# Allegro board WAITINGPATIENTSIGN.brd
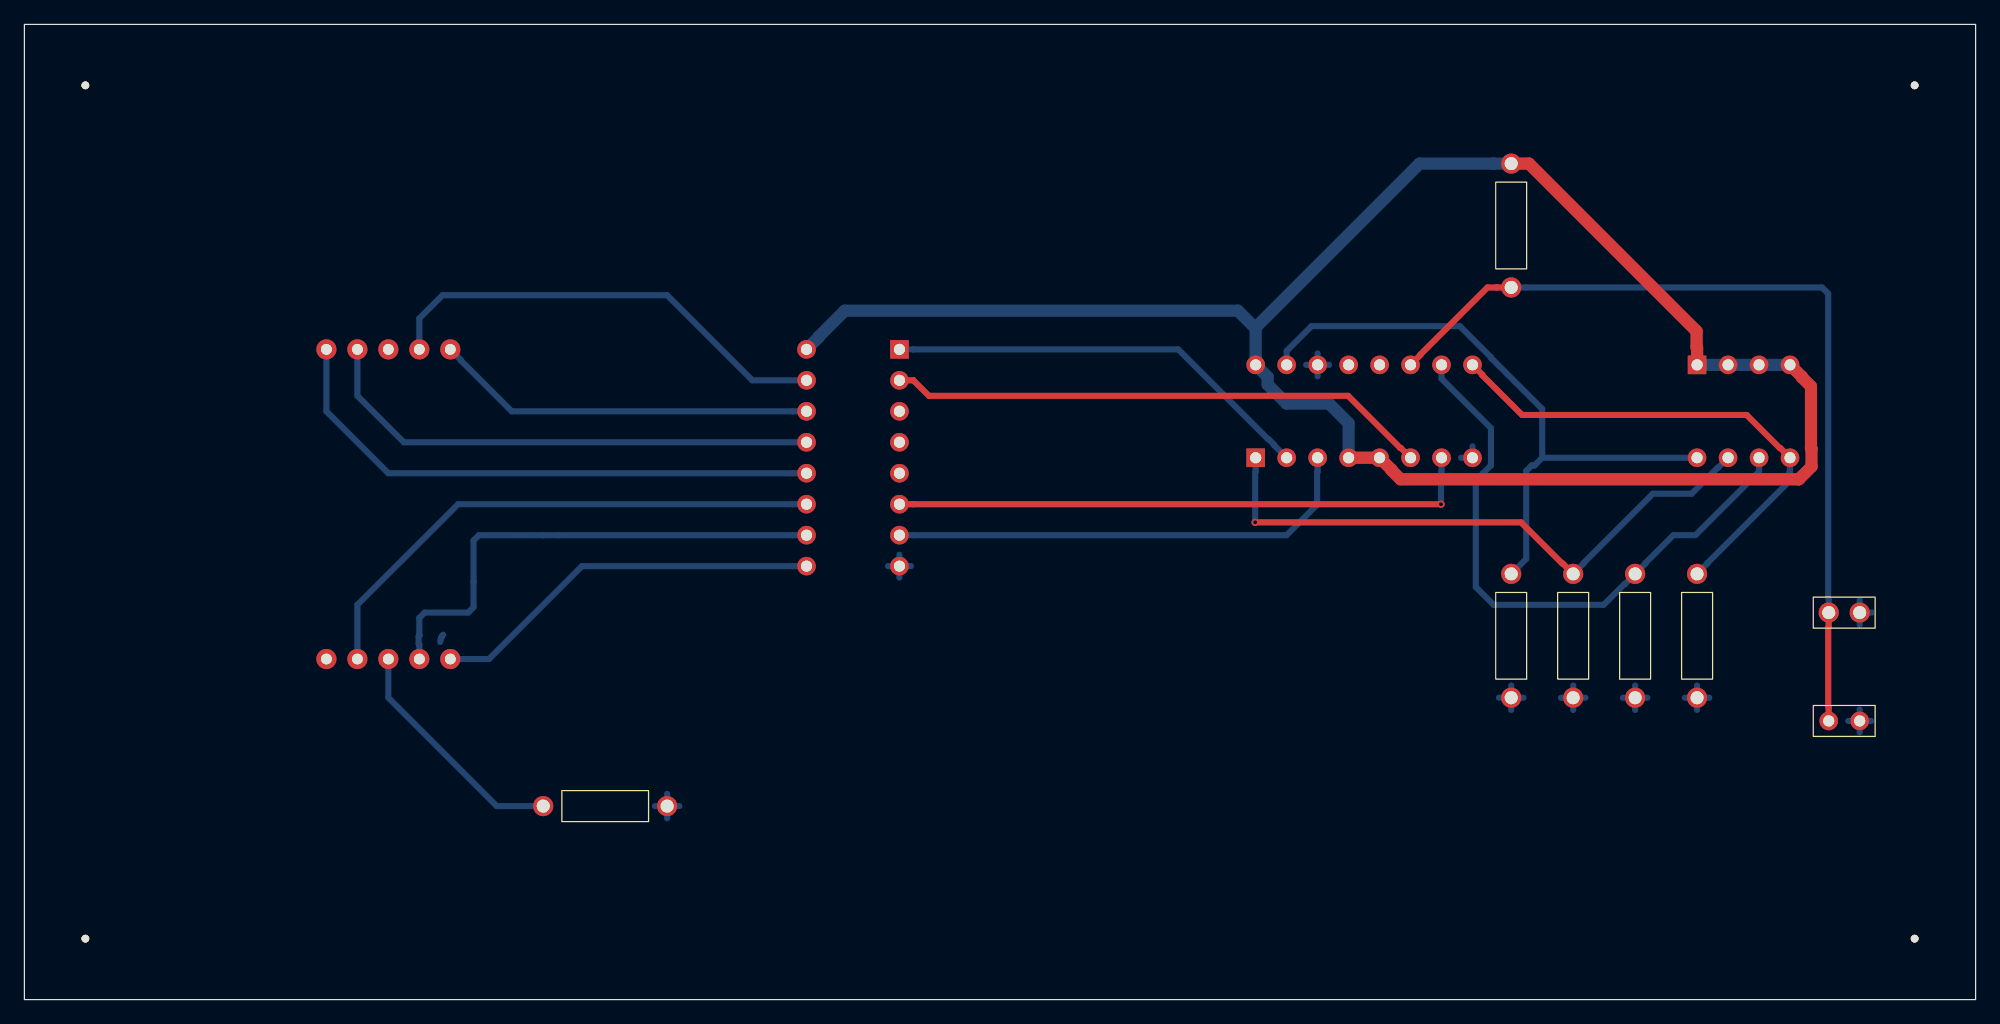
[diagram p0: board, top side]
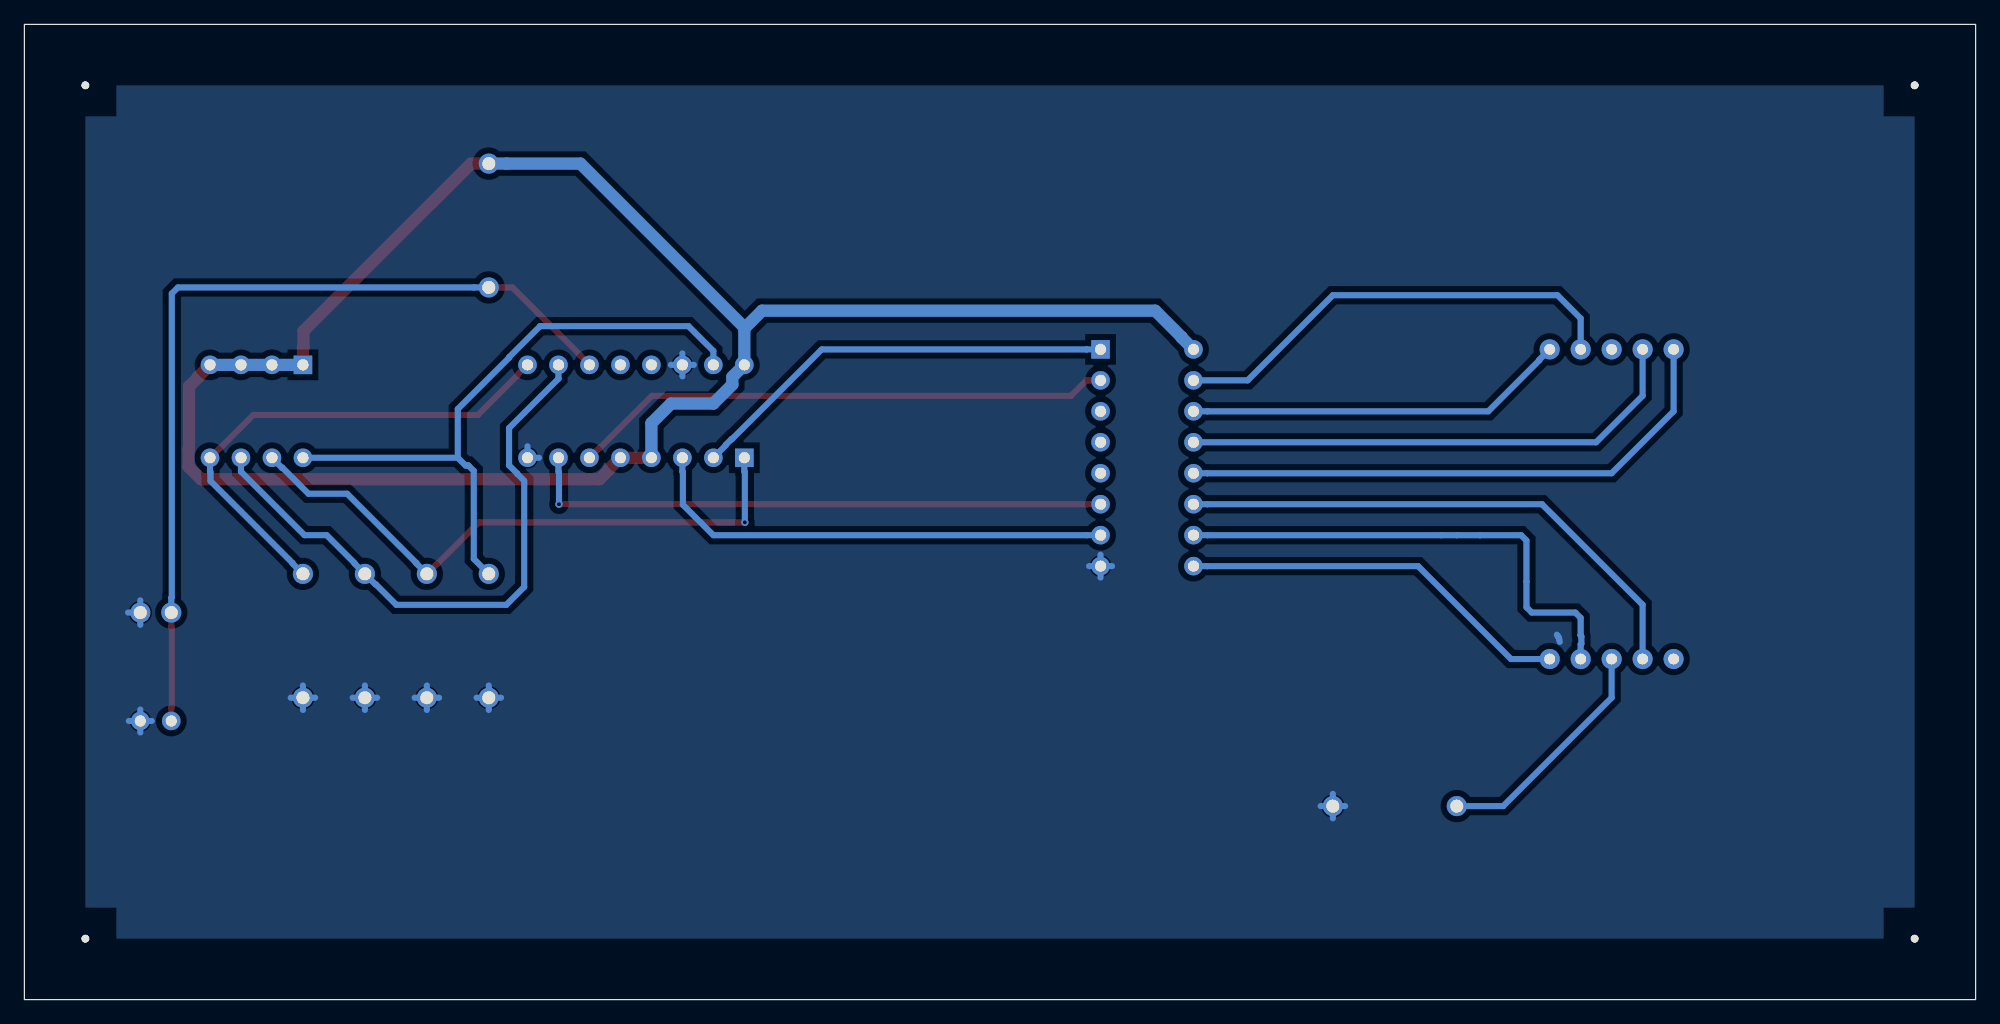
[diagram p1: board, bottom side, seen from below]

Outline 160 x 80 mm; copper layers: TOP, BOTTOM. Coordinates in mm from the lower left corner of the outline.
Outline path: rectangle 0,0 160,80

## Design rules (mm)
nets with their own width: min track width 1; nets GND VCC

## Placement (name value [footprint] x y rotation side)
C1  0.047u  [CAPCK05]  147.96 31.75 270 top
DS1  -  [FND_K]  17.14 35.56 180 bottom
NOREF  -  [unnamed]  5 75 0 top
NOREF#2  -  [unnamed]  155 5 0 top
NOREF#3  -  [unnamed]  155 75 0 top
NOREF#4  -  [unnamed]  5 5 0 top
R1  1k  [RES400]  121.92 68.58 180 top
R2  1k  [RES400]  137.16 34.92 180 top
R3  1k  [RES400]  132.08 34.92 180 top
R4  1k  [RES400]  127 34.92 180 top
R5  1k  [RES400]  121.92 34.92 180 top
R6  300  [RES400]  42.55 15.88 270 top
SW1  SW DIP-4/SM  [DIP8_3]  137.16 52.07 270 bottom
SW2  SW PUSHBUTTON  [JUMPER2]  150.5 22.86 180 top
U1  74LS192  [DIP16_3]  100.97 44.45 90 top
U2  7448  [DIP16_3]  71.75 53.34 180 bottom

## Library data of the parts
C1 = CAP NP: Tolerance: ***; User Part Number: ***
DS1 = FND_K_5
R1-R6 = R: Tolerance: ***; User Part Number: ***
SW1 = SW DIP-4/SM: Tolerance: ***; User Part Number: ***
SW2 = SW PUSHBUTTON: User Part Number: ***
U1 = 74LS192_0: Tolerance: ***; User Part Number: ***
U2 = 7448_0: Tolerance: ***; User Part Number: ***

## Footprints (pads in the part's own frame, mm; a bottom-side part is the same pattern mirrored in y, then rotated)
CAPCK05
  round 1.651 hole 1.067: 1(0,0) 2(0,2.54)
DIP8_3
  rect 1.524x1.524 hole 0.914: 1(0,0)
  round 1.524 hole 0.914: 2(0,-2.54) 3(0,-5.08) 4(0,-7.62) 5(7.62,-7.62) 6(7.62,-5.08) 7(7.62,-2.54) 8(7.62,0)
DIP16_3
  rect 1.524x1.524 hole 0.914: 1(0,0)
  round 1.524 hole 0.914: 2(0,-2.54) 3(0,-5.08) 4(0,-7.62) 5(0,-10.16) 6(0,-12.7) 7(0,-15.24) 8(0,-17.78) 9(7.62,-17.78) 10(7.62,-15.24) 11(7.62,-12.7) 12(7.62,-10.16) 13(7.62,-7.62) 14(7.62,-5.08) 15(7.62,-2.54) 16(7.62,0)
FND_K
  round 1.651 hole 0.889: 1(-17.78,-7.62) 2(-15.24,-7.62) 3(-12.7,-7.62) 4(-10.16,-7.62) 5(-7.62,-7.62) 6(-7.62,17.78) 7(-10.16,17.78) 8(-12.7,17.78) 9(-15.24,17.78) 10(-17.78,17.78)
JUMPER2
  round 1.524 hole 0.914: 1(0,0) 2(2.54,0)
RES400
  round 1.651 hole 1.067: 1(0,0) 2(0,10.16)
unnamed
  round 0.635 hole 3.175 unplated: (0,0)

## Nets
GND: C1.2 R2.2 R3.2 R4.2 R5.2 R6.2 SW2.1 U1.8(GND) U1.14(CLR) U2.8(GND)
VCC: R1.1 SW1.1(A1) SW1.2(A2) SW1.3(A3) SW1.4(A4) U1.4(CLKD) U1.5(CLKU) U1.16(VCC) U2.16(VCC)
N00502: R5.1 SW1.8(B1) U1.15(P0)
N00506: R4.1 SW1.7(B2) U1.1(P1)
N00510: R3.1 SW1.6(B3) U1.10(P2)
N00514: R2.1 SW1.5(B4) U1.9(P3)
N00708: C1.1 R1.2 SW2.2 U1.11(L\O\A\D\)
N00725: U1.3(Q0) U2.7(D0)
N00729: U1.2(Q1) U2.1(D1)
N00733: U1.6(Q2) U2.2(D2)
N00737: U1.7(Q3) U2.6(D3)
N02113: DS1.7(A) U2.13(A)
N02117: DS1.6(B) U2.12(B)
N02121: DS1.4(C) U2.11(C)
N02125: DS1.2(D) U2.10(D)
N02129: DS1.1(E) U2.9(E)
N02133: DS1.9(F) U2.15(F)
N02137: DS1.10(G) U2.14(G)
N04357: DS1.3(COM) R6.1

Pads without a net: DS1 5 8; U1 12 13; U2 3 4 5

## Via types
v1: diameter 0.61, hole 0.33, TOP to BOTTOM, 2 vias

## Routing (per net, layer and track width the routed paths; a pad name or vN(x,y) marks a point on that pad's centre or on a via; arc(x,y) is an arc through that point)
GND: length 36.8
  BOTTOM w0.5: 51.7,15.88 R6.2 ; R6.2 53.71,15.88 ; R6.2 52.7,14.87 ; R6.2 52.7,16.88 ; 34.18,29.66 34.2,29.73 34.21,29.75 34.23,29.79 34.24,29.8 34.29,29.88 34.34,29.93 ; R3.2 133.08,24.77 ; R3.2 132.08,25.77 ; R3.2 131.08,24.77 ; R3.2 132.08,23.76 ; 34.16,29.63 34.15,29.58 34.15,29.57 34.1,29.34 ; 127,23.76 R4.2 ; R4.2 127,25.77 ; R4.2 128,24.77 ; R4.2 126,24.77 ; 70.81,35.56 U2.8 ; U2.8 71.75,34.62 ; U2.8 72.69,35.56 ; U2.8 71.75,36.5 ; 136.16,24.77 R2.2 ; R2.2 137.16,23.76 ; R2.2 138.16,24.77 ; R2.2 137.16,25.77 ; 105.11,52.07 U1.14 ; U1.14 106.05,51.13 ; U1.14 106.98,52.07 ; U1.14 106.05,53.01 ; 121.92,23.76 R5.2 ; R5.2 120.92,24.77 ; R5.2 122.92,24.77 ; R5.2 121.92,25.77 ; 149.56,22.86 SW2.1 ; SW2.1 150.5,23.8 ; SW2.1 151.44,22.86 ; SW2.1 150.5,21.92 ; 117.81,44.45 U1.8 118.75,45.39 ; C1.2 150.5,32.75 ; C1.2 151.5,31.75 ; C1.2 150.5,30.75
VCC: length 160.7
  TOP w1: R1.1 123.37,68.58 137.12,54.84 137.12,53.5 137.16,53.46 SW1.1 ; SW1.4 145.76,51.09 145.76,51.04 146.5,50.31 146.5,45.22 146.54,45.18 146.54,43.72 145.51,42.69 145.47,42.69 145.47,42.69 112.84,42.69 112.11,43.42 112.11,43.47 U1.5 111.12,44.45 108.59,44.45 108.58,44.45
  BOTTOM w1: 100.92,55.1 99.51,56.52 67.27,56.52 65.12,54.36 65.12,54.32 64.14,53.34 ; 100.92,55.1 100.97,55.06 U1.16 101.95,51.09 101.95,50.45 103.5,48.9 106.97,48.9 108.58,47.28 108.58,44.45 ; 100.92,55.1 114.4,68.58 120.47,68.58 120.47,68.58 R1.1 ; SW1.4 144.78,52.07 142.24,52.07 SW1.3 142.24,52.07 139.7,52.07 SW1.2 139.7,52.07 137.16,52.07 SW1.1
N00502: length 53.2
  BOTTOM w0.5: SW1.8 124.46,44.45 ; 124.46,44.45 123.83,43.81 123.63,43.81 123.63,43.81 123.59,43.81 123.15,43.37 123.15,36.15 R5.1 ; 124.46,44.45 124.46,48.45 120.26,52.65 120.26,52.7 117.71,55.24 105.54,55.24 103.5,53.21 103.5,52.07
N00506: length 49.8
  TOP w0.5: R4.1 126.15,35.78 126.1,35.78 122.73,39.15 v1(100.92,39.15)
  BOTTOM w0.5: R4.1 127.85,35.78 127.85,35.82 133.53,41.5 136.71,41.5 138.85,43.64 138.89,43.64 SW1.7 ; v1(100.92,39.15) 100.92,43.27 100.97,43.31 U1.1
N00510: length 49.9
  BOTTOM w0.5: SW1.6 142.24,43.31 137.03,38.1 135.21,38.1 132.93,35.82 132.93,35.78 R3.1 131.23,34.07 131.19,34.07 129.5,32.38 120.48,32.38 119.02,33.85 119.02,42.56 119.59,43.13 119.59,43.16 120.26,43.82 120.26,46.88 116.2,50.93 U1.10
N00514: length 41.9
  TOP w0.5: U1.9 119.55,51.26 119.55,51.22 122.81,47.96 141.23,47.96 143.93,45.26 143.97,45.26 SW1.5
  BOTTOM w0.5: R2.1 138.01,35.78 138.01,35.82 144.74,42.54 144.74,43.27 144.78,43.31 SW1.5
N00708: length 72.2
  TOP w0.5: C1.1 147.96,30.55 147.91,30.5 147.91,24.04 147.96,24 SW2.2 ; R1.2 120.72,58.42 120.72,58.42 119.97,58.42 114.47,52.92 114.47,52.88 U1.11
  BOTTOM w0.5: R1.2 123.12,58.42 123.12,58.42 147.41,58.42 147.91,57.92 147.91,33 147.96,32.95 C1.1
N00725: length 39.2
  BOTTOM w0.5: U2.7 72.89,38.1 72.9,38.1 103.5,38.1 106,40.6 106,43.27 106.05,43.31 U1.3
N00729: length 35.5
  BOTTOM w0.5: U2.1 72.89,53.34 72.9,53.34 94.62,53.34 101.99,45.96 102.04,45.96 102.48,45.52 102.48,45.48 103.5,44.45
N00733: length 44.5
  TOP w0.5: U2.2 72.89,50.8 72.9,50.8 72.9,50.8 74.17,49.53 108.54,49.53 112.81,45.26 112.86,45.26 U1.6
N00737: length 48.2
  TOP w0.5: v1(116.16,40.64) 72.9,40.64 72.89,40.64 U2.6
  BOTTOM w0.5: U1.7 116.2,43.31 116.16,43.27 v1(116.16,40.64)
N02113: length 42.7
  BOTTOM w0.5: 27.77,53.34 27.3,53.34 27.3,49.53 31.11,45.72 64.14,45.72
N02117: length 46.6
  BOTTOM w0.5: 24.77,53.34 24.77,48.26 29.85,43.18 62.99,43.18 63,43.18 64.14,43.18
N02121: length 44.7
  BOTTOM w0.5: DS1.4 27.3,32.39 35.56,40.64 62.99,40.64 63,40.64 64.14,40.64
N02125: length 41.2
  BOTTOM w0.5: 64.14,38.1 63,38.1 62.99,38.1 43.81,38.1 42.54,38.1 40.64,38.1 40.64,38.1 37.27,38.1 36.83,37.66 36.83,34.29 36.83,32.19 36.39,31.75 32.82,31.75 32.38,31.31 32.38,29.9 32.38,29.89 32.37,29.84 32.36,29.82 32.33,29.79 32.33,29.2 32.38,29.14 DS1.2
N02129: length 32.4
  BOTTOM w0.5: DS1.1 38.1,27.94 45.72,35.56 62.99,35.56 63,35.56 64.14,35.56
N02133: length 38
  BOTTOM w0.5: DS1.9 32.38,55.88 34.29,57.78 52.71,57.78 59.69,50.8 64.14,50.8
N02137: length 31.3
  BOTTOM w0.5: 64.14,48.26 63,48.26 62.99,48.26 39.96,48.26 35.78,52.45 35.78,52.49 DS1.10
N04357: length 19.6
  BOTTOM w0.5: DS1.3 29.84,24.77 38.73,15.88 R6.1

## Copper pours and planes (outline as drawn; the poured copper is in the pictures)
GND on BOTTOM: 5,5 5,75 155,75 155,5
